# Altium PCB PCB1.PcbDoc
Units mm, origin at the board's own origin, x right, y up, seen from the top; angles counter-clockwise.
Board outline 80.01 x 100.01 mm, 2 copper layers (Top Layer, Bottom Layer); 40 components, 23 nets, 123 pads, 18 vias.
Unrouted connection lines stored in the file: 2.
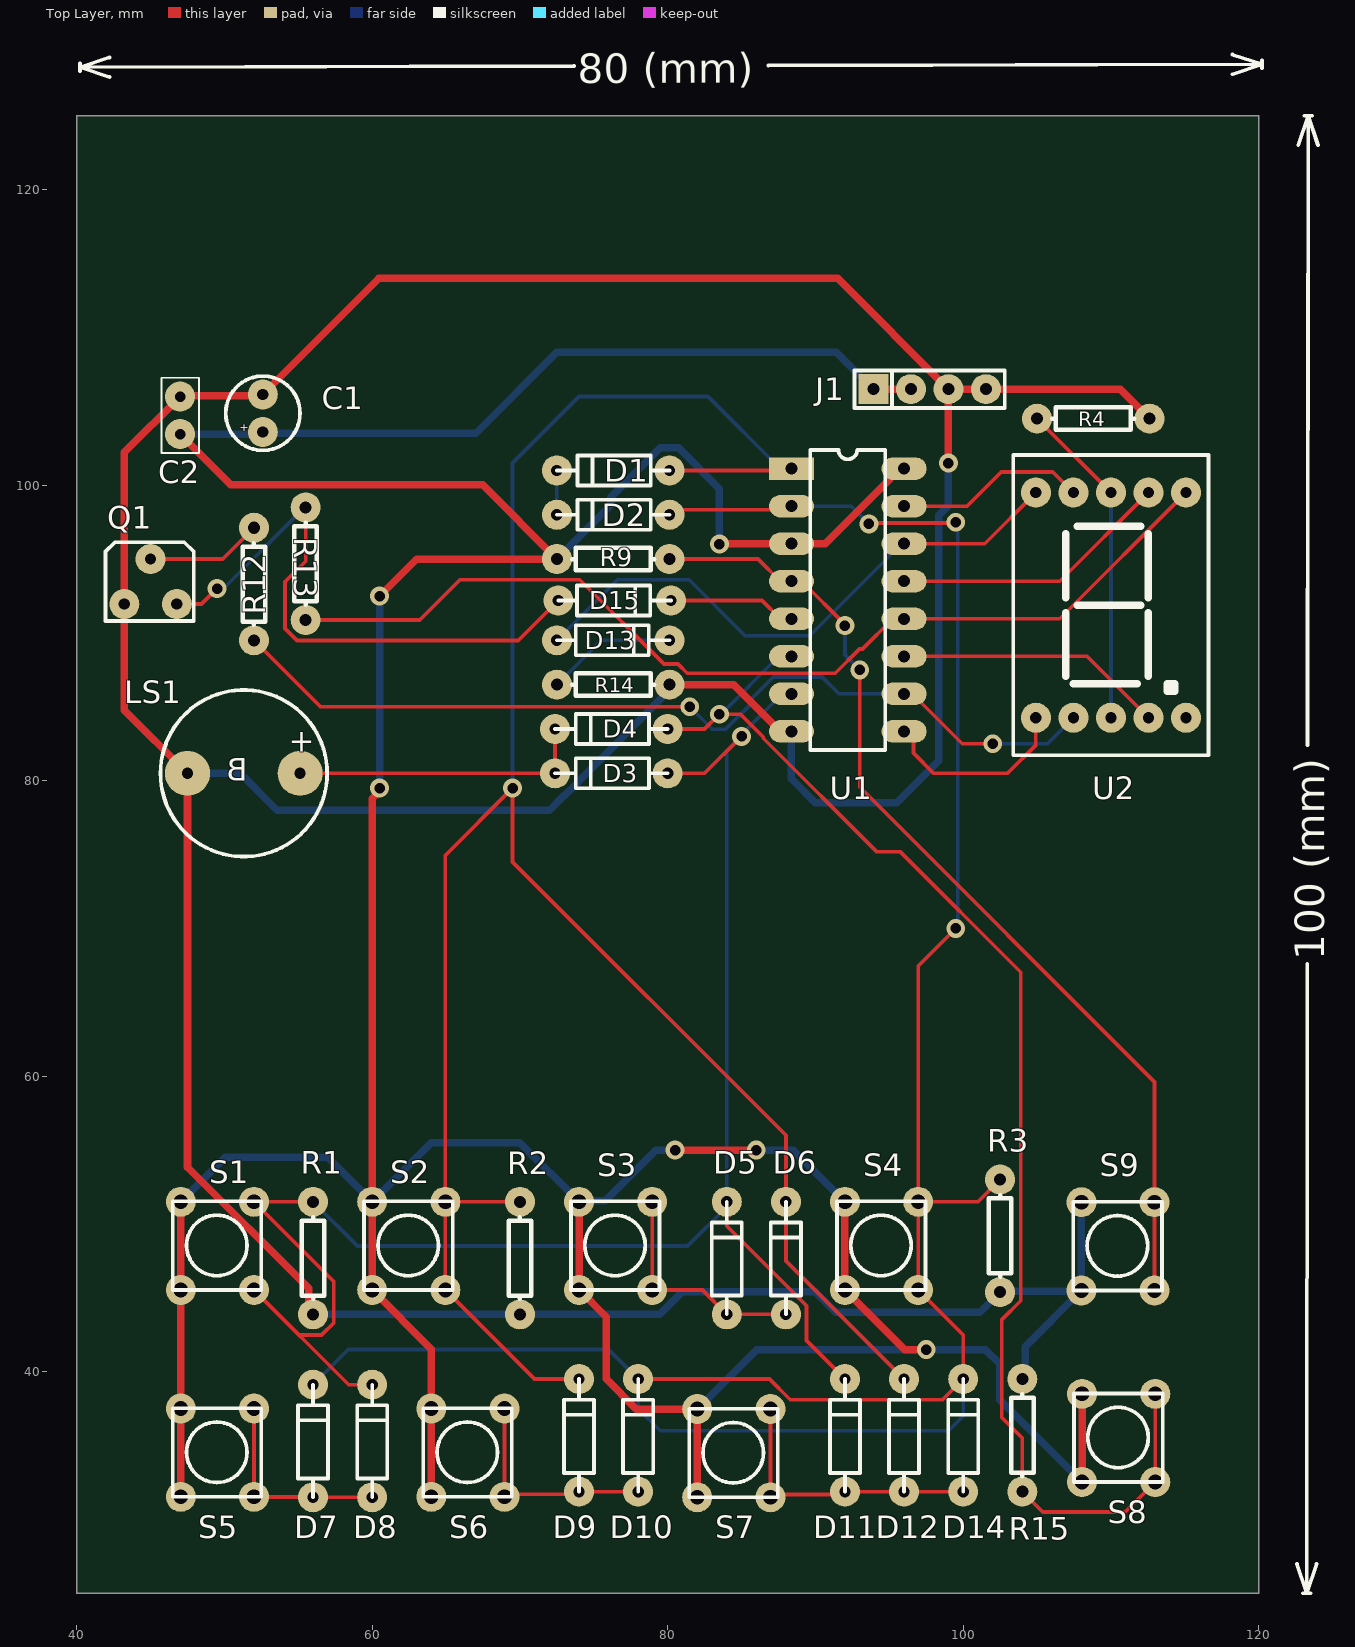
[diagram p0: Top Layer view]
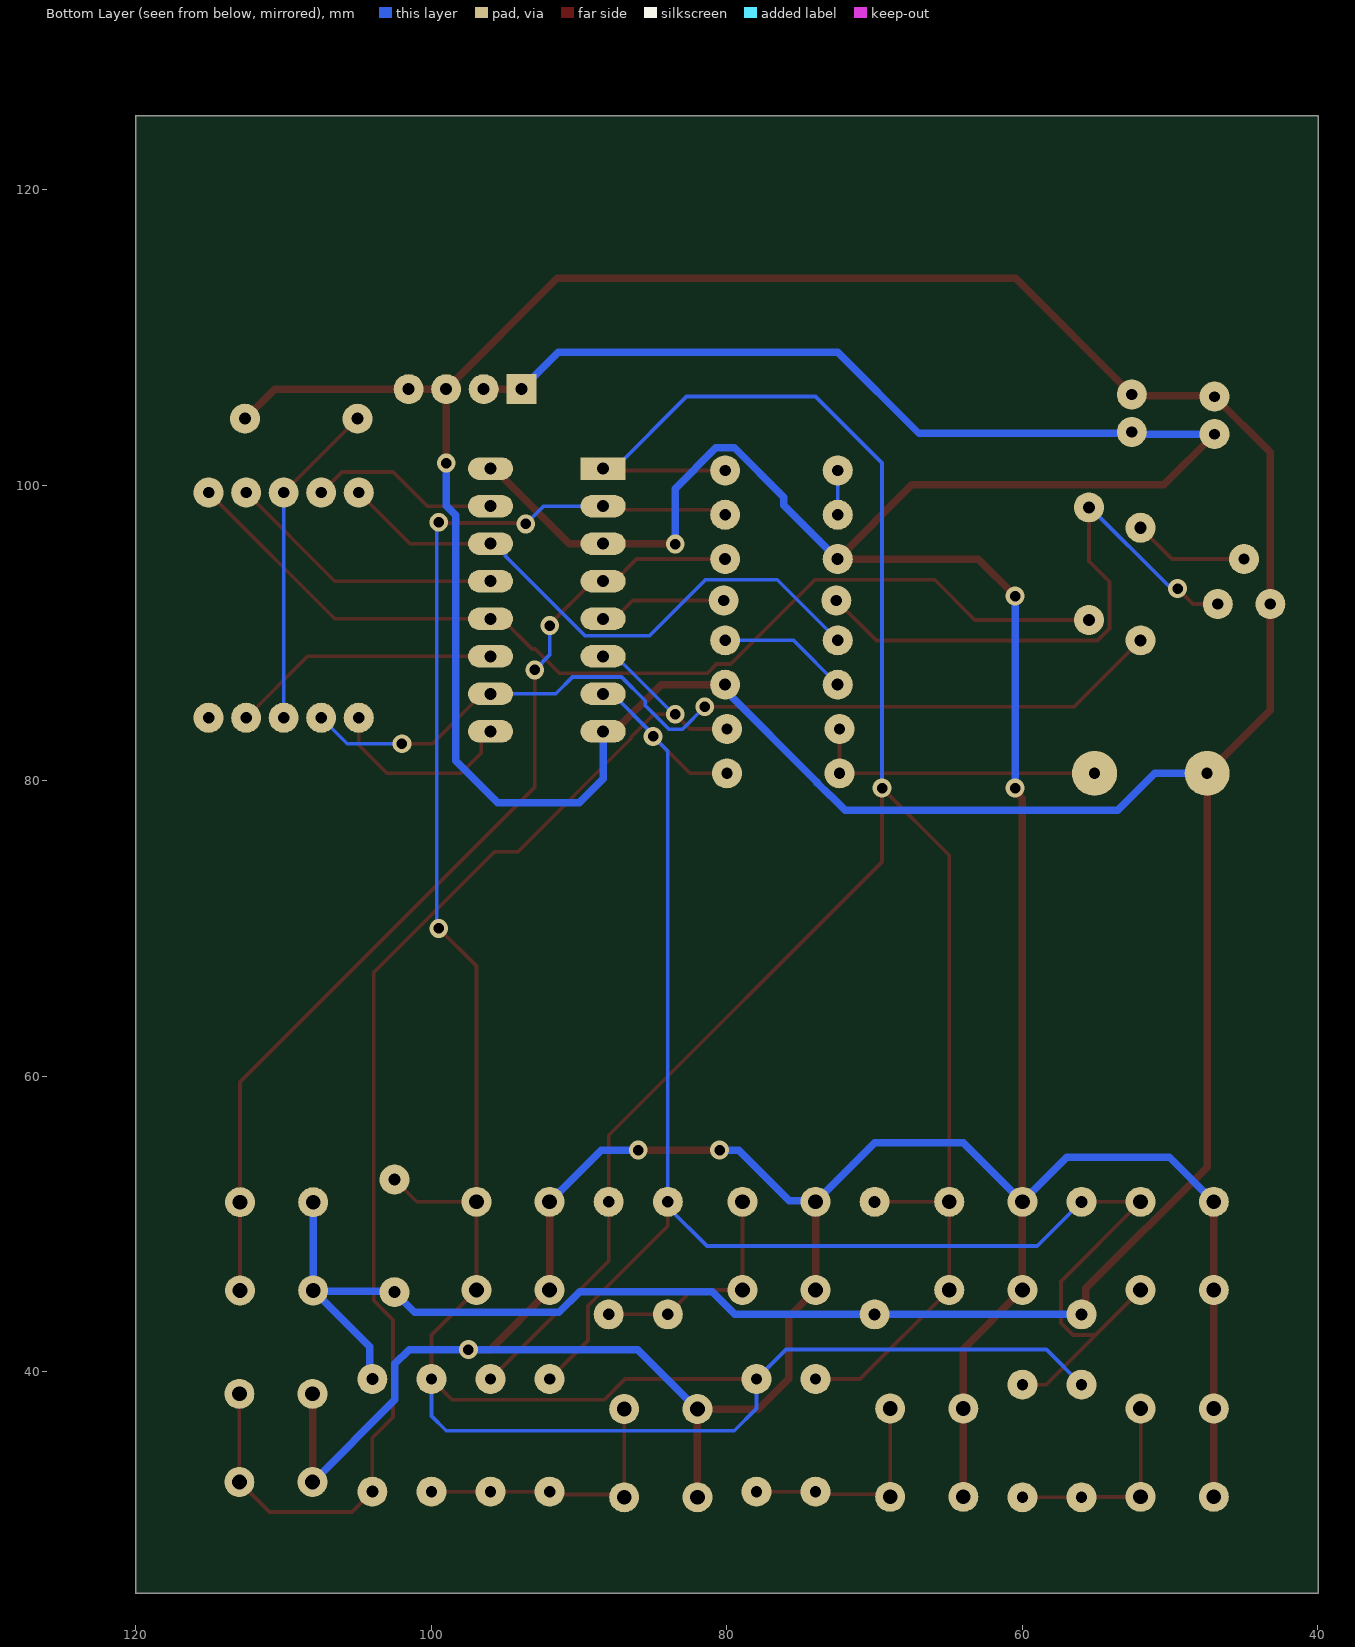
[diagram p1: Bottom Layer view, seen from below]

## Layer stack, top to bottom
Top Solder: solder mask 0.0102, Solder Resist, Dk 3.5
Top Layer: signal copper 0.0356
Dielectric 1: dielectric 0.32, FR-4, Dk 4.8
Bottom Layer: signal copper 0.0356
Bottom Solder: solder mask 0.0102, Solder Resist, Dk 3.5

## Board outline
39.993,25 ccw(c40,25) 40,24.993 120,24.993 ccw(c120,25) 120.007,25 120.007,125 ccw(c120,125) 120,125.007 40,125.007 ccw(c40,125) 39.993,125

## Design rules (kind name [scope] priority, off if disabled: settings)
Clearance [All] p1: gap=0.254 ignorepadtopadclearanceinfootprint=FALSE except(0: Arc-Hole Track-Hole SMDPad-Hole THPad-Hole Via-Hole Fill-Hole Poly-Hole Region-Hole Text-Hole)
PolygonConnect [All] p1: connectstyle=Relief reliefconductorwidth=0.254 reliefentries=4 polygonreliefangle="90 Angle" airgapwidth=0.254
RoutingVias [All] p1: holewidth=0.711 width=1.27 viastyle="Through Hole" minholewidth=0.711 minwidth=1.27 maxholewidth=0.711 maxwidth=1.27
SolderMaskExpansion [All] p1: expansion=0.102 istentingtop=FALSE
Width [All] p1: maxlimit=0.508 minlimit=0.254 preferedwidth=0.254
30 further rules are at their usual default settings.

## Components (designator, comment, footprint, x,y, rotation, side; value= is the part's Value field where it differs from the comment)
C1 "10uf" RB.1/.2 52.6,103.6 r90 top
C2 "104" RAD0.1 47,103.46 r90 top
D1 "IN4148" DIODE0.3 80.12,101 r180 top
D2 "IN4148" DIODE0.3 80.12,98 r180 top
D3 "IN4148" DIODE0.3 80,80.5 r180 top
D4 "IN4148" DIODE0.3 80,83.5 r180 top
D5 "IN4148" DIODE0.3 84,43.88 r90 top
D6 "IN4148" DIODE0.3 88,43.88 r90 top
D7 "IN4148" DIODE0.3 56,31.5 r90 top
D8 "IN4148" DIODE0.3 60,31.5 r90 top
D9 "IN4148" DIODE0.3 74,31.88 r90 top
D10 "IN4148" DIODE0.3 78,31.88 r90 top
D11 "IN4148" DIODE0.3 92,31.88 r90 top
D12 "IN4148" DIODE0.3 96,31.88 r90 top
D13 "IN4148" DIODE0.3 72.5,89.5 r0 top
D14 "IN4148" DIODE0.3 100,31.88 r90 top
D15 "IN4148" DIODE0.3 72.6,92.2 r0 top
J1 "CON4" SIP4 93.92,106.5 r0 top
LS1 "SPEAKER" H 55.12,80.5 r180 top
Q1 "NPN-8050" TO-92C 43.222,91.952 r0 top
R1 "10k" AXIAL0.3 56,43.88 r90 top
R2 "10k" AXIAL0.3 70,43.88 r90 top
R3 "10k" AXIAL0.3 102.5,53 r270 top
R4 "200" AXIAL0.3 112.62,104.5 r180 top
R9 "10k" AXIAL0.3 80.12,95 r180 top
R12 "100k" AXIAL0.3 52,89.5 r90 top
R13 "1k" AXIAL0.3 55.5,98.5 r270 top
R14 "10k" AXIAL0.3 80.12,86.5 r180 top
R15 "10k" AXIAL0.3 104,31.88 r90 top
S1 "SW-PB" SWPB 52,45.531 r0 top
S2 "SW-PB" SWPB 64.953,45.531 r0 top
S3 "SW-PB" SWPB 78.953,45.531 r0 top
S4 "SW-PB" SWPB 96.953,45.531 r0 top
S5 "SW-PB" SWPB 52,31.531 r0 top
S6 "SW-PB" SWPB 68.953,31.531 r0 top
S7 "SW-PB" SWPB 86.953,31.5 r0 top
S8 "SW-PB" SWPB 113,32.531 r0 top
S9 "SW-PB" SWPB 112.953,45.5 r0 top
U1 "CD4511" DIP16 88.38,101.12 r0 top
U2 "LED8" LED8 104.92,99.5 r0 top

## Footprints (in the part's own frame and the unit in brackets; to place one, negate y for a bottom-side part, rotate by r counter-clockwise, add the part's x,y. Pads: shape width x height; smd on the part's side, far side on the other; paste and mask are expansions set on the pad)
AXIAL0.3 [mil]
  round 80 hole 32: 1(0,0) 2(300,0)
  silkscreen extent 41,-30 259,30
DIODE0.3 [mil]
  round 80 hole 30: A(0,0) K(300,0)
  silkscreen extent 0,-40 300,40
DIP16 [mil]
  rect 120x60 hole 32: 1(0,0)
  oval 120x60 hole 32: 2(0,-100) 3(0,-200) 4(0,-300) 5(0,-400) 6(0,-500) 7(0,-600) 8(0,-700) 9(300,-700) 10(300,-600) 11(300,-500) 12(300,-400) 13(300,-300) 14(300,-200) 15(300,-100) 16(300,0)
  silkscreen extent 50,-750 250,50
H [mil]
  round 120 hole 30: 1(0,0) 2(300,0)
  silkscreen extent -72,-222 372,222
LED8 [mil]
  round 80 hole 30: 1(300,0) 2(400,0) 3(300,-600) 4(100,-600) 5(0,-600) 6(100,0) 7(0,0) 8(400,-600) 9(200,0) 10(200,-600)
  silkscreen extent -60,-700 460,100
RAD0.1 [mil]
  round 80 hole 28: 1(0,0) 2(100,0)
  silkscreen extent -50,-50 150,50
RB.1/.2 [mil]
  round 80 hole 30: 1(0,0) 2(100,0)
  silkscreen extent -49,-99 149,99
SIP4 [mil]
  rect 80x80 hole 32: 1(0,0)
  round 80 hole 32: 2(100,0) 3(200,0) 4(300,0)
  silkscreen extent -50,-50 350,50
SWPB [mil]
  round 80 hole 39.37: 1(-195,235) 2(0,235) 3(-195,0) 4(0,0)
  silkscreen extent -217,0 20,236
TO-92C [mil]
  round 80 hole 30: B(70,120) C(140,0) E(0,0)
  silkscreen extent -50,-45 185,165

## Part data
C1: library part ELECTRO1, "Electrolytic Capacitor"
C2: library part CAP, "Capacitor"
D1 D2 D3 D4 D5 D6 D7 D8 D9 D10 D11 D12 D13 D14 D15: library part DIODE
J1: "Connector"
Q1: library part NPN
R1 R2 R3 R4 R9 R12 R13 R14 R15: library part RES2

## Via types
v1: diameter 1.27, hole 0.711, Top Layer to Bottom Layer, 18 vias

## Nets (pads, with @x,y where several pads share a name; then routed paths per layer and width w, separated by ;. In a path a pad name is that pad's centre, name@x,y a point inside that pad or via, vN(x,y) a via of type N, cw(c..) or ccw(c..) an arc to the next point about the centre after c; other vN are vias at no path point)
GND: C1.2 C2.2 J1.3 J1.4 LS1.2 Q1.E R1.1 R2.1 R3.2 R4.1 R14.1 R15.2 S9.1 S9.3 U1.8 | length 296.7
  Top Layer w0.508: R1.1 55.708,44.172 55.708,45.636 47.5,53.845 LS1.2 43.222,84.778 Q1.E 43.222,102.222 C2.2 47.07,106.07 52.53,106.07 C1.2 60.46,114 91.5,114 J1.3 ; R14.1 84.458,86.5 87.618,83.34 U1.8 ; v1(99,101.5) J1.3 ; R4.1 110.62,106.5 J1.4 J1.3
  Bottom Layer w0.508: LS1.2 51.059,80.5 53.559,78 72,78 72.976,78.976 73.011,78.976 73.904,79.869 73.904,79.904 80.12,86.12 R14.1 ; R1.1 R2.1 79.457,43.88 80.981,45.404 89.972,45.404 91.369,44.007 101.127,44.007 R3.2 102.56,45.44 S9.3@107.94,45.44 ; U1.8 88.38,80.12 90,78.5 95.5,78.5 98.357,81.357 98.357,97.973 99,98.616 v1(99,101.5) ; R15.2 104.19,39.69 104.19,41.69 S9.3@107.94,45.44 ; S9.1 S9.3 S9.3@107.94,45.44
NetD1_A: D1.A D6.K D9.K D12.K R2.2 S2.2 S2.4 U1.1 | length 156.9
  Top Layer w0.254: R2.2 S2.2 ; D9.K 70.984,39.5 S2.4 S2.2 ; D1.A@79.7,100.7 D1.A@79.985,100.985 ; D1.A 88.26,101 U1.1 ; D12.K 88,47.5 D6.K 88,56 69.5,74.5 v1(69.5,79.5) 64.953,74.953 S2.2
  Bottom Layer w0.254: v1(69.5,79.5) 69.5,101.5 74,106 82.738,106 87.618,101.12 U1.1
NetD1_K: D1.K D2.K D3.K D4.K LS1.1 | length 23.3
  Top Layer w0.254: LS1.1 D3.K D4.K
  Bottom Layer w0.254: D2.K D1.K
NetD2_A: D2.A D7.K D10.K D14.K R3.1 S4.2 S4.4 U1.2 | length 161.3
  Top Layer w0.254: D10.K 86.898,39.5 88.295,38.103 98.603,38.103 D14.K 100,42.484 S4.4 S4.2 ; D2.A 80.457,98.337 88.137,98.337 U1.2 ; v1(93.621,97.379) 93.679,97.437 99.437,97.437 v1(99.5,97.5) ; v1(99.5,70) 96.953,67.453 S4.2 ; R3.1 101,51.5 S4.2
  Bottom Layer w0.254: D7.K 58.38,41.5 76,41.5 D10.K 78,37.5 79.5,36 99,36 100,37 D14.K ; U1.2 92.42,98.58 v1(93.621,97.379) ; v1(99.5,70) 99.635,70.135 99.635,97.365 v1(99.5,97.5)
NetD3_A: D3.A D5.K D8.K D11.K R1.2 S1.2 S1.4 U1.7 | length 121.5
  Top Layer w0.254: R1.2 S1.2 57.397,46.103 57.397,43.301 56.579,42.483 55.048,42.483 S1.4 58.411,39.12 D8.K ; D3.A 82.5,80.5 v1(85,83) ; D5.K 84,49.856 89.397,44.459 89.397,42.103 D11.K ; U1.7@87.618,85.88 U1.7
  Bottom Layer w0.254: R1.2 59,48.5 81.351,48.5 84,51.149 D5.K 84,82 v1(85,83) 85,83.131 87.749,85.88 U1.7
NetD4_A: D4.A R15.1 S8.2 S8.4 U1.6 | length 90.8
  Top Layer w0.254: D4.A 82.5,83.5 v1(83.5,84.5) 84.937,84.5 86.475,82.962 86.475,82.867 94.159,75.183 95.754,75.183 103.897,67.04 103.897,44.801 102.603,43.507 102.603,36.918 104,35.521 R15.1 105.38,30.5 110.969,30.5 S8.4 S8.2
  Bottom Layer w0.254: v1(83.5,84.5) 83.599,84.5 87.519,88.42 U1.6
NetD5_A: D5.A D6.A S3.2 S3.4 | length 15.7
  Top Layer w0.254: S3.2 S3.4 82.349,45.531 D5.A D6.A
NetD7_A: D7.A D8.A S5.2 S5.4 | length 14
  Top Layer w0.254: S5.2 S5.4 52.015,31.515 55.985,31.515 D7.A D8.A
NetD9_A: D9.A D10.A S6.2 S6.4 | length 15.2
  Top Layer w0.254: S6.2 S6.4 69.128,31.705 73.826,31.705 D9.A D10.A
NetD11_A: D11.A D12.A D14.A S7.2 S7.4 | length 19.2
  Top Layer w0.254: S7.2 S7.4 87.143,31.69 91.81,31.69 D11.A D12.A D14.A
NetD13_A: D13.A U1.14 U2.7 | length 41.1
  Top Layer w0.254: U1.14@94.995,95.453 95.582,96.04 U1.14 101.46,96.04 U2.7
  Bottom Layer w0.254: D13.A 76.597,93.597 81.457,93.597 85.237,89.817 89.615,89.817 94.995,95.197 94.995,95.453 95.582,96.04 U1.14
NetD13_K: D13.K D15.K R14.2 U1.5 | length 17.5
  Top Layer w0.254: D15.K 86.378,92.2 87.618,90.96 U1.5
  Bottom Layer w0.254: R14.2 75.5,89.5 D13.K
NetD15_A: D15.A Q1.C R13.1 | length 40.2
  Top Layer w0.254: Q1.C 48.452,91.952 v1(49.5,93) ; R13.1 55.5,94.859 54.103,93.462 54.103,90.301 54.921,89.483 69.883,89.483 D15.A
  Bottom Layer w0.254: v1(49.5,93) 49.694,93.194 50.118,93.194 55.424,98.5 R13.1
  Bottom Layer w0.508: Q1.C@46.749,91.923 Q1.C
NetQ1_B: Q1.B R12.2 | length 7.9
  Top Layer w0.254: Q1.B 49.88,95 R12.2
NetR4_2: R4.2 U2.9 U2.10 | length 22.3
  Top Layer w0.254: R4.2 U2.9
  Bottom Layer w0.254: U2.10 U2.9
NetR9_1: R9.1 S9.2 S9.4 U1.4 | length 67.5
  Top Layer w0.254: R9.1 86.118,95 87.618,93.5 U1.4 89.071,93.5 92,90.571 v1(92,90.5) ; v1(93,87.5) 93,79.564 112.953,59.611 S9.2 S9.4
  Bottom Layer w0.254: v1(92,90.5) 92,88.5 v1(93,87.5)
NetR12_1: R12.1 U1.10 U2.4 | length 62.2
  Top Layer w0.254: R12.1 56.5,85 v1(81.5,85) ; U1.10 96.557,85.88 99.937,82.5 v1(102,82.5)
  Bottom Layer w0.254: v1(81.5,85) 83.016,83.484 83.921,83.484 85.533,85.096 85.533,85.411 87.145,87.023 90.448,87.023 91.591,85.88 U1.10 ; v1(102,82.5) 105.7,82.5 U2.4
NetR13_2: R13.2 U1.12 U2.2 | length 68.4
  Top Layer w0.254: R13.2 63.221,90.88 65.938,93.597 74.047,93.597 79.747,87.897 80.699,87.897 81.319,87.277 91.34,87.277 92.974,88.911 93.189,88.911 95.238,90.96 106.54,90.96 U2.2
NetU1_9: U1.9 U2.5 | length 13.3
  Top Layer w0.254: U1.9 96.048,83.34 96.635,82.753 96.635,81.865 98,80.5 103,80.5 104.92,82.42 U2.5
NetU1_11: U1.11 U2.3 | length 18.3
  Top Layer w0.254: U1.11 108.38,88.42 U2.3
NetU1_13: U1.13 U2.1 | length 19
  Top Layer w0.254: U1.13 106.54,93.5 U2.1
NetU1_15: U1.15 U2.6 | length 13
  Top Layer w0.254: U1.15 100.265,98.58 102.582,100.897 106.063,100.897 U2.6
VCC: C1.1 C2.1 J1.1 J1.2 R9.2 S1.1 S1.3 S2.1 S2.3 S3.1 S3.3 S4.1 S4.3 S5.1 S5.3 S6.1 S6.3 S7.1 S7.3 S8.1 S8.3 U1.3 U1.16 | length 343.5
  Top Layer w0.508: S5.3 S5.1 S1.3 S1.1 ; C2.1@47.07,103.53 C2.1 50.436,100.024 67.476,100.024 R9.2 63,95 v1(60.5,92.5) ; C1.1@52.53,103.53 C1.1 ; v1(60.5,79.5) 60.5,79.294 60,78.794 S2.1 S2.3 64,41.531 S6.1 S6.3 ; S3.1 S3.3 75.83,43.701 75.83,39.515 77.876,37.469 S7.1 S7.3 ; v1(80.5,55) v1(86,55) ; v1(83.5,96.016) 83.512,96.028 88.368,96.028 U1.3 90.666,96.04 95.044,100.418 95.044,100.651 U1.16@95.513,101.12 ; S4.1 S4.3 96.031,41.5 v1(97.5,41.5) ; J1.1 J1.2 ; U1.16@95.238,101.12 U1.16@95.513,101.12 ; U1.16 U1.16@95.513,101.12 ; S8.3 S8.1
  Bottom Layer w0.508: C2.1 52.46,103.46 52.5,103.5 67,103.5 72.5,109 91.42,109 J1.1 ; S1.1 50.047,54.5 57,54.5 S2.1 64,55.5 70,55.5 S3.1 74.072,51.572 75.778,51.572 79.206,55 v1(80.5,55) ; v1(60.5,79.5) v1(60.5,92.5) ; R9.2 76.14,98.64 76.14,99.175 79.489,102.524 80.751,102.524 83.5,99.775 v1(83.5,96.016) ; S7.1 86.031,41.5 v1(97.5,41.5) 101.5,41.5 102.476,40.524 102.476,38.102 S8.3 ; v1(86,55) 88.5,55 S4.1
pads on no net: U2.8

## Silkscreen, mask and mechanical layers (free items; w line width, h text height)
Top Overlay:
  lines w0.254: 40.228,128.538 40.23,128.03 ; 42.227,128.955 40.229,128.284 ; 42.231,127.622 40.229,128.284 ; 73.658,128.367 40.229,128.284 ; 86.8,128.4 120.229,128.484 ; 118.227,129.145 120.229,128.484 ; 118.231,127.812 120.229,128.484 ; 120.228,128.738 120.23,128.23 ; 122.588,27.005 123.253,25.004 ; 122.684,123.004 123.352,125.004 ; 122.999,25.004 123.507,25.004 ; 123.098,125.004 123.606,125.004 ; 123.295,67.6 123.253,25.004 ; 123.31,82.408 123.352,125.004 ; 123.922,27.003 123.253,25.004 ; 124.017,123.003 123.352,125.004
  text "80 (mm)" at 73.915,127.216 h2 r0.14
  text "100 (mm)" at 124.448,67.853 h2 r89.94
Bottom Solder:
  lines w0.013: 40,125 120,125 ; 40,125 40,25 120,25 120,125 ; 40,125 120,125

## Text inside footprints (layer, text, board x,y; h text height)
C1: Top Overlay "+" at 51.584,103.6 h0.51 r90
LS1: Top Overlay "B" at 51.564,79.992 h1.52; Top Overlay "+" at 54.358,83.294 h1.52 r180